# Altium PCB FQDMDPCBv1.1.PcbDoc (part 1 of 2)
Units mil, origin at the board's own origin, x right, y up, seen from the top; angles counter-clockwise.
Board outline 4880 x 5300 mil, 2 copper layers (Top Layer, Bottom Layer); 36 components, 29 nets, 122 pads, 0 vias.
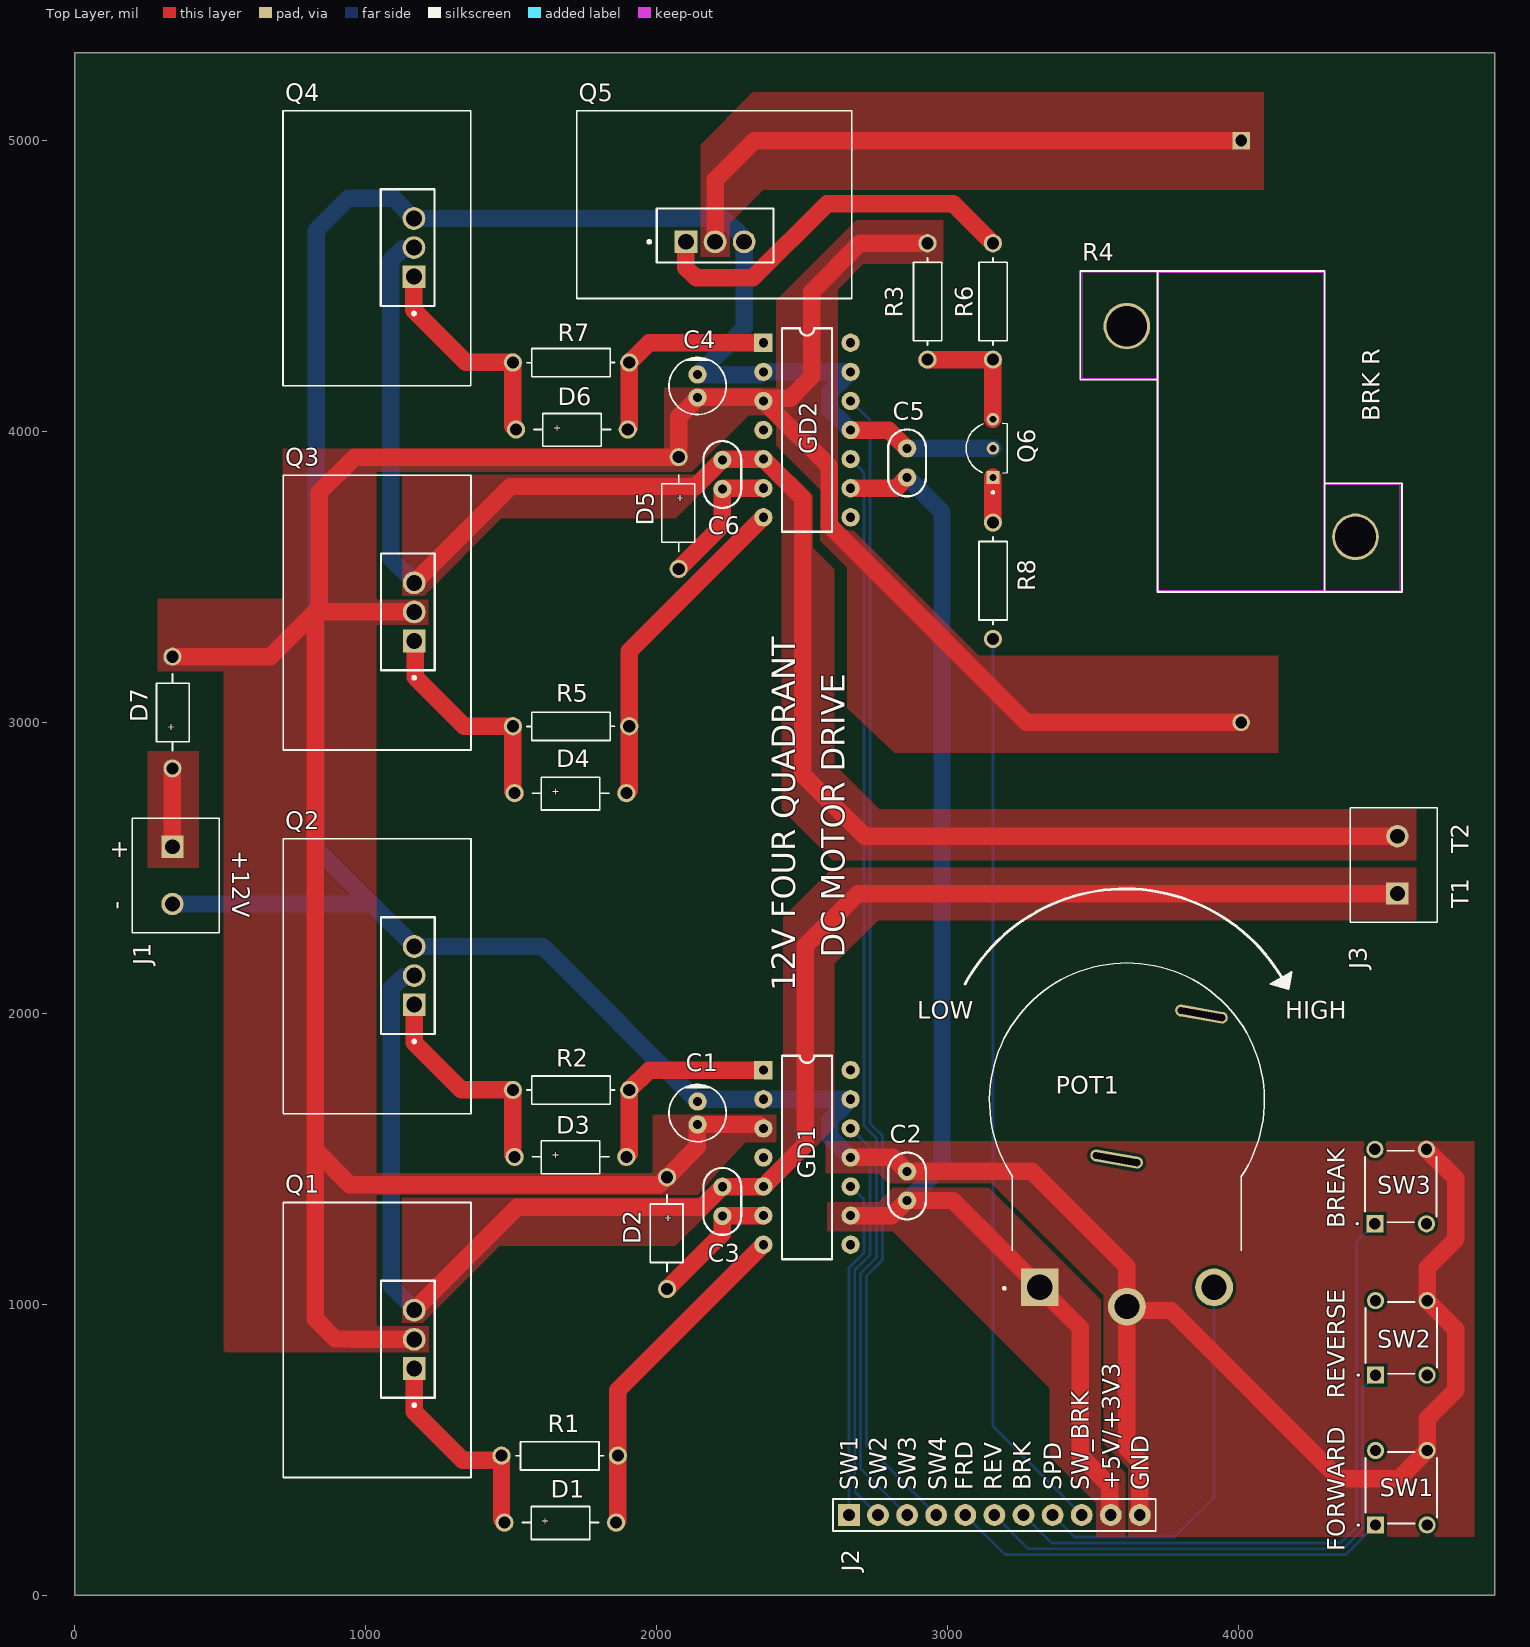
[diagram p0: Top Layer view]
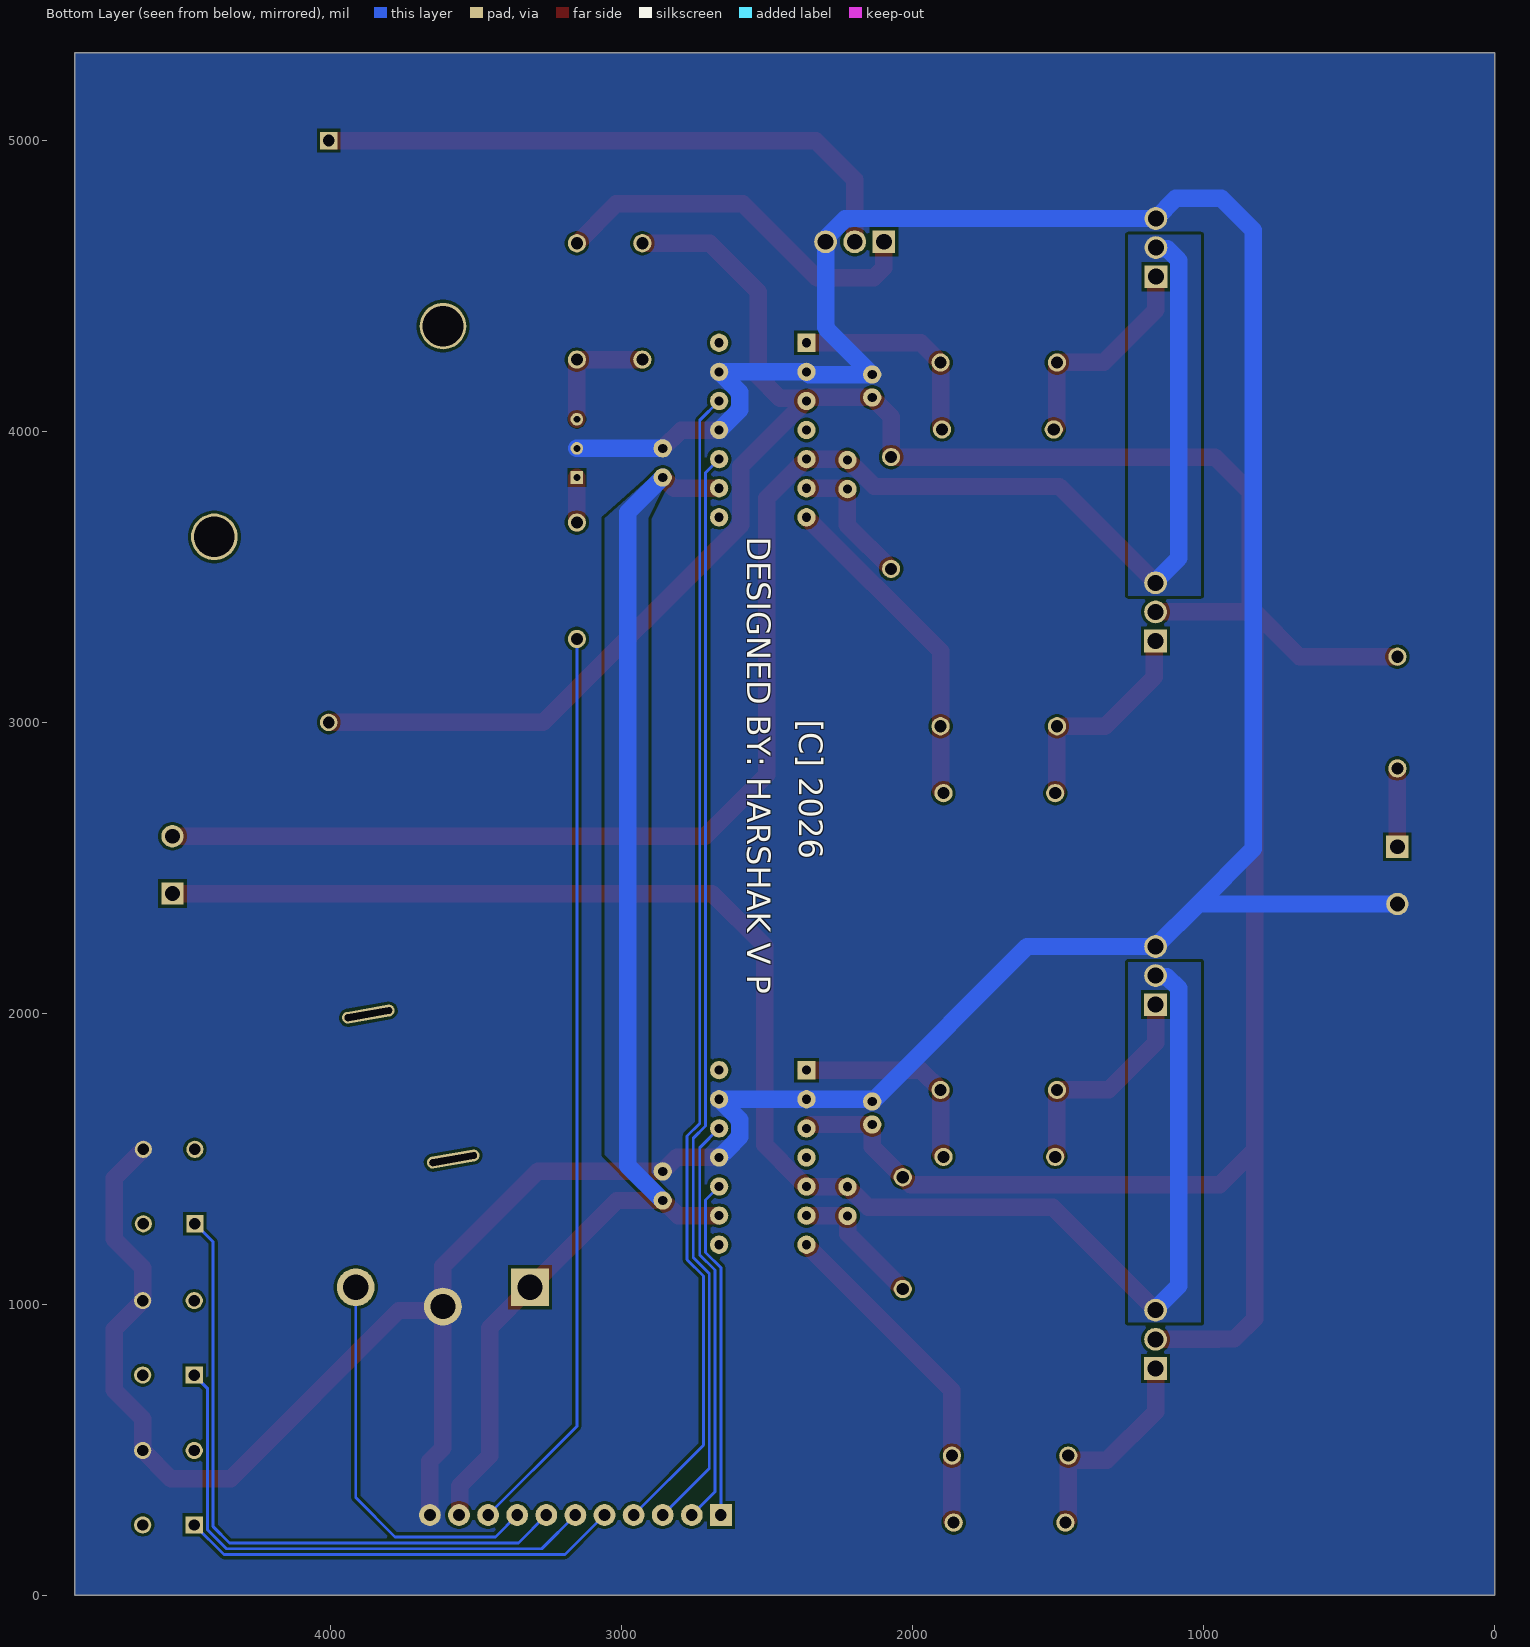
[diagram p1: Bottom Layer view, seen from below]
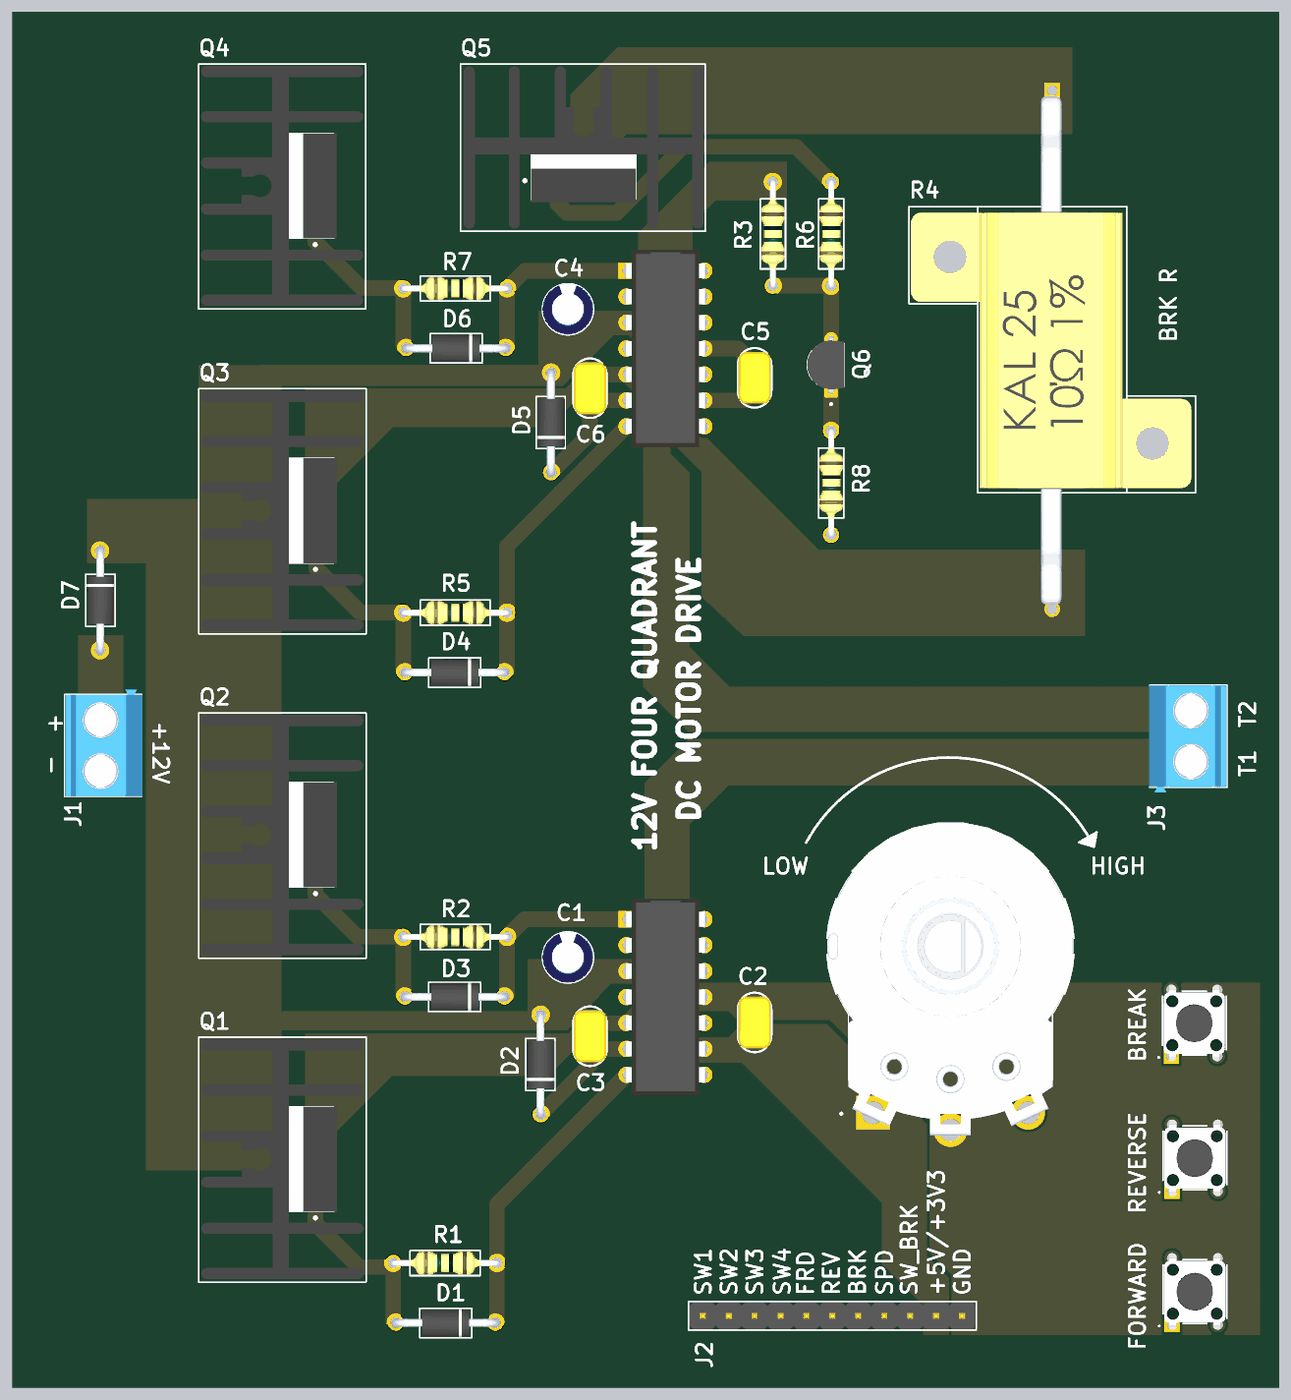
[diagram p2: 3D render of the assembled board from above, using the file's embedded part models]

## Layer stack, top to bottom
Top Solder: solder mask 0.4, Solder Resist, Dk 3.5
Top Layer: signal copper 1.4
Dielectric 1: dielectric 12.6, FR-4, Dk 4.8
Bottom Layer: signal copper 1.4
Bottom Solder: solder mask 0.4, Solder Resist, Dk 3.5

## Board outline
0,0 0,5300 4880,5300 4880,0

## Design rules (kind name [scope] priority, off if disabled: settings)
Clearance [All] p1: gap=10 ignorepadtopadclearanceinfootprint=FALSE
Height [All] p1: minheight=0 maxheight=1500 prefheight=500
HoleSize HoleSizeException [WithinRoom('DR_Room') or WithinRoom('POT_Room')] p1: absolutevalues=TRUE maxlimit=200 minlimit=1 maxpercent=80.000 minpercent=20.000
HoleSize [All] p2: absolutevalues=TRUE maxlimit=100 minlimit=1 maxpercent=80.000 minpercent=20.000
PolygonConnect [All] p1: connectstyle=Direct reliefconductorwidth=10 reliefentries=4 polygonreliefangle="90 Angle" airgapwidth=10
RoomDefinition POT_Room [False vs False] p1: confinementstyle=ConfineIn formatcopy=TRUE lockcomponents=FALSE outline 3325,2165 4125,2165 4125,1365 3325,1365
RoomDefinition DR_Room [False vs False] p2: confinementstyle=ConfineIn formatcopy=TRUE lockcomponents=FALSE outline 3410,4600 4610,4600 4610,3400 3410,3400
RoutingVias [All] p1: holewidth=28 width=50 viastyle="Through Hole" minholewidth=28 minwidth=50 maxholewidth=28 maxwidth=50
SolderMaskExpansion [All] p1: expansion=0 istentingtop=FALSE
SupplyNets "Schematic Supply Nets_2" [InNet('GND')] p1: voltage=0.000
SupplyNets "Schematic Supply Nets_1" [InNet('+12V')] p2: voltage=0.000
SupplyNets "Schematic Supply Nets" [InNet('CON_LOG')] p3: voltage=0.000
Width [All] p1: maxlimit=100 minlimit=10 preferedwidth=10
28 further rules are at their usual default settings.

## Components (designator, comment, footprint, x,y, rotation, side; value= is the part's Value field where it differs from the comment)
C1 "22uF, 50V" Capacitor_Polarized_TH 2140,1617.26 r90 top
C2 "0.1uF, 50V" Capacitor_Ceramic_TH 2860,1456 r270 top value=100nF
C3 "0.22uF, 50W" Capacitor_Ceramic_TH 2225,1403 r270 top value=220nF
C4 "22uF, 50V" Capacitor_Polarized_TH 2140,4116 r90 top
C5 "0.1uF, 50V" Capacitor_Ceramic_TH 2860,3941 r270 top value=100nF
C6 "0.22uF, 50W" Capacitor_Ceramic_TH 2225,3901 r270 top value=220nF
D1 "UF4007" DIODE_TH 1476,249 r0 top
D2 "UF4007" DIODE_TH 2035,1436 r270 top
D3 "UF4007" DIODE_TH 1511,1506 r0 top
D4 "UF4007" DIODE_TH 1511,2756 r0 top
D5 "UF4007" DIODE_TH 2075,3911 r270 top
D6 "UF4007" DIODE_TH 1516,4006 r0 top
D7 "UF4007" DIODE_TH 335,2841 r90 top
GD1 "IR2110PBF" IR2110PBF_DIP14 2366,1804 r0 top
GD2 "IR2110PBF" IR2110PBF_DIP14 2366,4304 r0 top
J1 "TB002-500-02BE" Terminal_Block 335,2571.85 r270 top
J2 "0022284245" Conneting_Jumpers 2660,275 r90 top
J3 "TB002-500-02BE" Terminal_Block 4545,2411 r90 top
POT1 "10k" Potentiometer 3615.55,1700 r0 top value=10kΩ
Q1 "IRFZ44NPBF" IRFZ44NPBF 1166,879 r90 top value=17.5MΩ
Q2 "IRFZ44NPBF" IRFZ44NPBF 1166,2129 r90 top value=17.5MΩ
Q3 "IRFZ44NPBF" IRFZ44NPBF 1166,3379 r90 top value=17.5MΩ
Q4 "IRFZ44NPBF" IRFZ44NPBF 1165,4631 r90 top value=17.5MΩ
Q5 "IRFZ44NPBF" IRFZ44NPBF 2200,4651 r0 top value=17.5MΩ
Q6 "BC547A" TRANS_BC547A 3155,3941 r90 top
R1 "10R, 1/2W" RESISTOR_TH 1466,479 r0 top value=10Ω
R2 "10R, 1/2W" RESISTOR_TH 1505,1736 r0 top value=10Ω
R3 "1K, 1/2W" RESISTOR_TH 2930,4246 r90 top value=1kΩ
R4 "10R, 25W" Braking_Resistor 4008,4999 r270 top value=10Ω
R5 "10R, 1/2W" RESISTOR_TH 1505,2986 r0 top value=10Ω
R6 "10R, 1/2W" RESISTOR_TH 3155,4246 r90 top value=10Ω
R7 "10R, 1/2W" RESISTOR_TH 1505,4236 r0 top value=10Ω
R8 "4.7K, 1/2W" RESISTOR_TH 3155,3286 r90 top value=4.7kΩ
SW1 "3-1825910-5" Pushbutton 4647.17,496.91 r90 top
SW2 "3-1825910-5" Pushbutton 4647.17,1011.91 r90 top
SW3 "3-1825910-5" Pushbutton 4645,1531.91 r90 top

## Footprints (in the part's own frame and the unit in brackets; to place one, negate y for a bottom-side part, rotate by r counter-clockwise, add the part's x,y. Pads: shape width x height; smd on the part's side, far side on the other; paste and mask are expansions set on the pad)
Braking_Resistor [mil]
  rect 60x60 hole 40 paste-99999 mask+0: 1(0,0)
  round 60 hole 40 paste-99999 mask+0: 2(2000,0)
  round 160 hole 140 unplated: 3(638,-393) 4(1362,393)
  Top Layer keep-out region: 453.5,-282.5 453.5,282.5 1546.5,282.5 1546.5,-282.5
  Top Layer keep-out region: 817.5,-282.5 453.5,-282.5 453.5,-547.5 817.5,-547.5
  Top Layer keep-out region: 1182.5,282.5 1546.5,282.5 1546.5,547.5 1182.5,547.5
  silkscreen extent 448,-552 1552,553, body extent 22,-545 1982,537, height 551
Capacitor_Ceramic_TH [mm]
  round 1.6 hole 0.8: 1(0,0) 2(2.54,0)
  silkscreen extent -1.65,-1.65 4.19,1.65, body extent -1.27,-1.58 3.81,1.6, height 7.37
Capacitor_Polarized_TH [mm]
  round 1.6 hole 0.8: 1(0,0) 2(2,0)
  silkscreen extent -1.5,-2.5 3.5,2.5, body extent -1.48,-2.49 3.52,2.51, height 12.41
Conneting_Jumpers [mm]
  rect 1.9x1.9 hole 1.02: 1(0,0)
  round 1.9 hole 1.02: 2(0,-2.54) 3(0,-5.08) 4(0,-7.62) 5(0,-10.16) 6(0,-12.7) 7(0,-15.24) 8(0,-17.78) 9(0,-20.32) 10(0,-22.86) 11(0,-25.4)
  silkscreen extent -1.4,-26.8 1.4,1.4, body extent -1.27,-26.67 1.27,1.27, height 5.95
DIODE_TH [mm] "DIODE STANDARD 1000V 1A DO204AC"
  round 1.59 hole 1.06 mask+0.102: 1(0,0) 2(9.754,0)
  silkscreen extent 1.55,-1.47 8.24,1.4, body extent -0.41,-1.39 10.17,1.33, height 2.71
IR2110PBF_DIP14 [mm]
  rect 1.6x1.6 hole 0.8: 1(0,0)
  round 1.6 hole 0.8: 2(0,-2.54) 3(0,-5.08) 4(0,-7.62) 5(0,-10.16) 6(0,-12.7) 7(0,-15.24) 8(7.62,-15.24) 9(7.62,-12.7) 10(7.62,-10.16) 11(7.62,-7.62) 12(7.62,-5.08) 13(7.62,-2.54) 14(7.62,0)
  silkscreen extent 1.63,-16.51 5.99,1.27, body extent -0.15,-17.27 7.77,2.03, height 5.33
IRFZ44NPBF [mm]
  rect 1.99x1.99 hole 1.39 paste-2539.97 mask+0: 1(-2.54,0)
  round 1.99 hole 1.39 paste-2539.97 mask+0: 2(0,0) 3(2.54,0)
  silkscreen extent -12.06,-4.95 11.94,11.43, body extent -11.75,-4.7 11.75,11.2, height 25.94
Potentiometer [mm]
  rect 3.3x3.3 / inner round 3.3 / far side rect 3.3x3.3 hole 2.2: 1(-7.607,-16.314)
  round 3.3 hole 2.2: 2(0,-18) 3(7.607,-16.314)
  oval 4.65x1.05 hole 0.6 slot 4.2 at 170 deg rot 170: S1(-0.903,-5.121) S2(6.507,7.535)
  silkscreen extent -12,-16.5 12,12, body extent -12.19,-18.52 12.18,12.17, height 35.21
Pushbutton [mil]
  rect 59x59 / inner round 60 / far side rect 59x59 hole 39 paste-99999 mask+0: 1(-255.91,177.17)
  round 59 / inner round 60 / far side round 59 hole 39 paste-99999 mask-29.5: 2(0,177.17) 3(-255.91,0) 4(0,0)
  silkscreen extent -251,-34 -5,212, body extent -285,-29 27,207, height 276
RESISTOR_TH [mm] "RES 10 OHM 5% 1/2W AXIAL"
  round 1.59 hole 1.06 mask+0.102: 1(0,0) 2(10.16,0)
  silkscreen extent 1.24,-1.24 8.9,1.22, body extent -0.3,-1.17 10.46,1.14, height 2.93
Terminal_Block [mm]
  rect 1.95x1.95 / inner round 1.95 / far side rect 1.95x1.95 hole 1.3: 1(0,0)
  round 1.95 hole 1.3: 2(5,0)
  silkscreen extent -2.5,-3.5 7.5,4.1, body extent -2.99,-3.45 7.51,4.15, height 10.01
TRANS_BC547A [mm]
  rect 1.108x1.108 / inner round 1.108 / far side rect 1.108x1.108 hole 0.6 mask+0.102: 1(-2.54,0)
  round 1.108 hole 0.6 mask+0.102: 2(0,0) 3(2.54,0)
  silkscreen extent -3.94,-1.27 2.2,2.33, body extent -2.83,-1.33 2.83,2.35, height 9.97

## Part data
C1 C4: library part SK226M050AC3AAKPLP, "CAP ALUM 22UF 20% 50V RADIAL TH", Manufacturer="Yageo Group", Supplier Part Number=399-6108-ND, Category=Capacitors, Manufacturer Part Number=SK226M050AC3AAKPLP, Pricing="1=0.17, 10=0.105, 50=0.0756, 100=0.0661, 500=0.04946, 1000=0.04419, 2500=0.03855, 5000=0.03511 (USD)", Stock=13633, Supplier=DigiKey
C2 C5: library part C320C104K5R5TA, "CAP CER 0.1UF 50V X7R RADIAL", Case/Package=SOT-23-5, Dielectric=X7R, Dielectric Material=Ceramic, Dropout Voltage=260mV, Manufacturer="Yageo Group", Max Operating Temperature=125°C, Min Input Voltage=8V, Min Operating Temperature=-55°C, Output Current=150mA, Output Voltage=5V, Supplier Part Number=399-4264-ND, Tolerance=10%, Voltage=50V, Category="Ceramic Capacitors", China RoHS=Compliant, ComponentLink1Description=https://datasheet.octopart.com:443/C320C104K5R5TA-KEMET-datasheet-182049030.pdf?src-supplier=IHS, ComponentLink1URL=https://datasheet.octopart.com:443/C320C104K5R5TA-KEMET-datasheet-182049030.pdf?src-supplier=IHS, ComponentLink2Description=https://datasheet.octopart.com:443/C320C104K5R5TA-KEMET-datasheet-101577198.pdf?src-supplier=Farnell, ComponentLink2URL=https://datasheet.octopart.com:443/C320C104K5R5TA-KEMET-datasheet-101577198.pdf?src-supplier=Farnell, ComponentLink3Description=https://datasheet.octopart.com:443/C320C104K5R5TA-KEMET-datasheet-82557385.pdf?src-supplier=Farnell, ComponentLink3URL=https://datasheet.octopart.com:443/C320C104K5R5TA-KEMET-datasheet-82557385.pdf?src-supplier=Farnell, ComponentLink4Description=https://datasheet.octopart.com:443/C320C104K5R5TA-Kemet-datasheet-120818.pdf?src-supplier=Farnell, ComponentLink4URL=https://datasheet.octopart.com:443/C320C104K5R5TA-Kemet-datasheet-120818.pdf?src-supplier=Farnell, ComponentLink5Description=https://datasheet.octopart.com:443/C320C104K5R5TA-KEMET-datasheet-181962010.pdf?src-supplier=Farnell, ComponentLink5URL=https://datasheet.octopart.com:443/C320C104K5R5TA-KEMET-datasheet-181962010.pdf?src-supplier=Farnell, ComponentLink6Description=https://datasheet.octopart.com:443/C320C104K5R5TA-KEMET-datasheet-74832429.pdf?src-supplier=Farnell, ComponentLink6URL=https://datasheet.octopart.com:443/C320C104K5R5TA-KEMET-datasheet-74832429.pdf?src-supplier=Farnell, ComponentLink7Description=https://datasheet.octopart.com:443/C320C104K5R5TA-Kemet-datasheet-66414062.pdf?src-supplier=element14+APAC, ComponentLink7URL=https://datasheet.octopart.com:443/C320C104K5R5TA-Kemet-datasheet-66414062.pdf?src-supplier=element14+APAC, ComponentLink8Description=https://datasheet.octopart.com:443/C320C104K5R5TA-Kemet-datasheet-17277851.pdf?src-supplier=Newark, ComponentLink8URL=https://datasheet.octopart.com:443/C320C104K5R5TA-Kemet-datasheet-17277851.pdf?src-supplier=Newark, ComponentLink9Description=https://datasheet.octopart.com:443/C320C104K5R5TA-KEMET-datasheet-176142619.pdf?src-supplier=Newark, ComponentLink9URL=https://datasheet.octopart.com:443/C320C104K5R5TA-KEMET-datasheet-176142619.pdf?src-supplier=Newark, ComponentLink10Description=https://datasheet.octopart.com:443/C320C104K5R5TA-Kemet-datasheet-7601896.pdf?src-supplier=Newark, ComponentLink10URL=https://datasheet.octopart.com:443/C320C104K5R5TA-Kemet-datasheet-7601896.pdf?src-supplier=Newark, ComponentLink11Description=https://datasheet.octopart.com:443/C320C104K5R5TA-KEMET-datasheet-134136068.pdf?src-supplier=Electro+Sonic, ComponentLink11URL=https://datasheet.octopart.com:443/C320C104K5R5TA-KEMET-datasheet-134136068.pdf?src-supplier=Electro+Sonic, ComponentLink12Description=https://datasheet.octopart.com:443/C320C104K5R5TA-KEMET-datasheet-140078780.pdf?src-supplier=TME, ComponentLink12URL=https://datasheet.octopart.com:443/C320C104K5R5TA-KEMET-datasheet-140078780.pdf?src-supplier=TME, ComponentLink13Description=https://datasheet.octopart.com:443/C320C104K5R5TA-KEMET-datasheet-68332006.pdf?src-supplier=TME, ComponentLink13URL=https://datasheet.octopart.com:443/C320C104K5R5TA-KEMET-datasheet-68332006.pdf?src-supplier=TME, ComponentLink14Description=https://datasheet.octopart.com:443/C320C104K5R5TA-Kemet-datasheet-62346230.pdf?src-supplier=TME, ComponentLink14URL=https://datasheet.octopart.com:443/C320C104K5R5TA-Kemet-datasheet-62346230.pdf?src-supplier=TME, ComponentLink15Description=https://datasheet.octopart.com:443/C320C104K5R5TA-Kemet-datasheet-17577310.pdf?src-supplier=TME, ComponentLink15URL=https://datasheet.octopart.com:443/C320C104K5R5TA-Kemet-datasheet-17577310.pdf?src-supplier=TME, ComponentLink16Description=https://datasheet.octopart.com:443/C320C104K5R5TA-KEMET-datasheet-151955016.pdf?src-supplier=SOS+electronic, ComponentLink16URL=https://datasheet.octopart.com:443/C320C104K5R5TA-KEMET-datasheet-151955016.pdf?src-supplier=SOS+electronic, ComponentLink17Description=https://datasheet.octopart.com:443/C320C104K5R5TA-Kemet-datasheet-48843691.pdf?src-supplier=RS+(Formerly+Allied+Electronics), ComponentLink17URL=https://datasheet.octopart.com:443/C320C104K5R5TA-Kemet-datasheet-48843691.pdf?src-supplier=RS+(Formerly+Allied+Electronics), ComponentLink18Description=https://datasheet.octopart.com:443/C320C104K5R5TA-Kemet-datasheet-10533010.pdf?src-supplier=Jameco, ComponentLink18URL=https://datasheet.octopart.com:443/C320C104K5R5TA-Kemet-datasheet-10533010.pdf?src-supplier=Jameco, Composition=Ceramic, Depth=3.18mm, Dissipation Factor=2.5%, Export Control Classification Number (ECCN) Code=EAR99, Harmonized Tariff Schedule (HTS) Code=8532.24.00.60, Height=5.84mm, Height - Seated (Max)=6.604mm, Introduction Date=2006-07-12, Lead Diameter=510µm, Lead Free="Lead Free", Lead Length=7mm, Lead Pitch=2.54mm, Lead/Base Style=Straight, Length=5.08mm, Lifecycle Status=Production, Manufacturer Part Number=C320C104K5R5TA, Mounting Technology="Surface Mount", Number of Terminals=2, Packaging=Bulk, Pins=2, Pricing="1=0.32, 10=0.186, 50=0.1356, 100=0.1202, 500=0.09408, 1000=0.08603, 2500=0.07755, 5000=0.07244 (USD)", Radiation Hardening=No, REACH SVHC=Yes, RoHS=Compliant, Schedule B="8532240060, 8532240060|8532240060, 8532240060|8532240060|8532240060, 8532240060|8532240060|8532240060|8532240060", Stock=174098, Supplier=DigiKey, Terminal Pitch=2.54mm, Termination=Radial, Voltage Rating=50V, Voltage Rating (DC)=50V, Width=3.18mm
C3 C6: library part C322C224M5U5TA, "CAP CER 0.22UF 50V Z5U RADIAL", Case/Package=Radial, Dielectric=Z5U, Dielectric Material=Ceramic, Manufacturer="Yageo Group", Max Operating Temperature=85°C, Min Operating Temperature=10°C, Supplier Part Number=399-4354-ND, Tolerance=20%, Voltage=50V, Category="Ceramic Capacitors", China RoHS=Compliant, ComponentLink1Description=https://datasheet.octopart.com:443/C322C224M5U5TA-KEMET-datasheet-182049035.pdf?src-supplier=IHS, ComponentLink1URL=https://datasheet.octopart.com:443/C322C224M5U5TA-KEMET-datasheet-182049035.pdf?src-supplier=IHS, ComponentLink2Description=https://datasheet.octopart.com:443/C322C224M5U5TA-KEMET-datasheet-68331992.pdf?src-supplier=Farnell, ComponentLink2URL=https://datasheet.octopart.com:443/C322C224M5U5TA-KEMET-datasheet-68331992.pdf?src-supplier=Farnell, ComponentLink3Description=https://datasheet.octopart.com:443/C322C224M5U5TA-KEMET-datasheet-101577214.pdf?src-supplier=Farnell, ComponentLink3URL=https://datasheet.octopart.com:443/C322C224M5U5TA-KEMET-datasheet-101577214.pdf?src-supplier=Farnell, ComponentLink4Description=https://datasheet.octopart.com:443/C322C224M5U5TA-KEMET-datasheet-181962113.pdf?src-supplier=Farnell, ComponentLink4URL=https://datasheet.octopart.com:443/C322C224M5U5TA-KEMET-datasheet-181962113.pdf?src-supplier=Farnell, ComponentLink5Description=https://datasheet.octopart.com:443/C322C224M5U5TA-KEMET-datasheet-74832493.pdf?src-supplier=Farnell, ComponentLink5URL=https://datasheet.octopart.com:443/C322C224M5U5TA-KEMET-datasheet-74832493.pdf?src-supplier=Farnell, ComponentLink6Description=https://datasheet.octopart.com:443/C322C224M5U5TA-KEMET-datasheet-166950196.pdf?src-supplier=Newark, ComponentLink6URL=https://datasheet.octopart.com:443/C322C224M5U5TA-KEMET-datasheet-166950196.pdf?src-supplier=Newark, ComponentLink7Description=https://datasheet.octopart.com:443/C322C224M5U5TA-Kemet-datasheet-7601896.pdf?src-supplier=Newark, ComponentLink7URL=https://datasheet.octopart.com:443/C322C224M5U5TA-Kemet-datasheet-7601896.pdf?src-supplier=Newark, ComponentLink8Description=https://datasheet.octopart.com:443/C322C224M5U5TA-Kemet-datasheet-66414231.pdf?src-supplier=element14+APAC, ComponentLink8URL=https://datasheet.octopart.com:443/C322C224M5U5TA-Kemet-datasheet-66414231.pdf?src-supplier=element14+APAC, ComponentLink9Description=https://datasheet.octopart.com:443/C322C224M5U5TA-KEMET-datasheet-83995801.pdf?src-supplier=element14+APAC, ComponentLink9URL=https://datasheet.octopart.com:443/C322C224M5U5TA-KEMET-datasheet-83995801.pdf?src-supplier=element14+APAC, ComponentLink10Description=https://datasheet.octopart.com:443/C322C224M5U5TA-KEMET-datasheet-134136068.pdf?src-supplier=Electro+Sonic, ComponentLink10URL=https://datasheet.octopart.com:443/C322C224M5U5TA-KEMET-datasheet-134136068.pdf?src-supplier=Electro+Sonic, ComponentLink11Description=https://datasheet.octopart.com:443/C322C224M5U5TA-Kemet-datasheet-120818.pdf?src-supplier=RS+(Formerly+Allied+Electronics), ComponentLink11URL=https://datasheet.octopart.com:443/C322C224M5U5TA-Kemet-datasheet-120818.pdf?src-supplier=RS+(Formerly+Allied+Electronics), ComponentLink12Description=https://datasheet.octopart.com:443/C322C224M5U5TA-Kemet-datasheet-48843691.pdf?src-supplier=RS+(Formerly+Allied+Electronics), ComponentLink12URL=https://datasheet.octopart.com:443/C322C224M5U5TA-Kemet-datasheet-48843691.pdf?src-supplier=RS+(Formerly+Allied+Electronics), ComponentLink13Description=https://datasheet.octopart.com:443/C322C224M5U5TA-Kemet-datasheet-62346230.pdf?src-supplier=TME, ComponentLink13URL=https://datasheet.octopart.com:443/C322C224M5U5TA-Kemet-datasheet-62346230.pdf?src-supplier=TME, ComponentLink14Description=https://datasheet.octopart.com:443/C322C224M5U5TA-Kemet-datasheet-17577310.pdf?src-supplier=TME, ComponentLink14URL=https://datasheet.octopart.com:443/C322C224M5U5TA-Kemet-datasheet-17577310.pdf?src-supplier=TME, Depth=3.18mm, Dissipation Factor=4%, Export Control Classification Number (ECCN) Code=EAR99, Harmonized Tariff Schedule (HTS) Code=8532.24.00.60, Height=6.6mm, Height - Seated (Max)=6.604mm, Introduction Date=2006-07-12, Lead Diameter=510µm, Lead Free="Lead Free", Lead Length=7mm, Lead Pitch=5.08mm, Lead/Base Style="Formed Leads", Length=5.08mm, Lifecycle Status=Production, Manufacturer Part Number=C322C224M5U5TA, Mounting Technology="PCB, Through Hole", Number of Terminals=2, Packaging=Bulk, Pricing="1=0.46, 10=0.278, 50=0.2064, 100=0.1846, 500=0.14772, 1000=0.13634, 2500=0.12433, 5000=0.1171 (USD)", Radiation Hardening=No, REACH SVHC=Yes, RoHS=Compliant, Schedule B="8532240060, 8532240060|8532240060|8532240060|8532240060|8532240060", Stock=6246, Supplier=DigiKey, Terminal Pitch=5.08mm, Termination=Radial, Voltage Rating=50V, Voltage Rating (DC)=50V, Weight=45.359237g, Width=3.18mm
D1 D2 D3 D4 D5 D6 D7: "DIODE STANDARD 1000V 1A DO204AC", Forward Voltage=1.7V, Manufacturer=Diotec, Manufacturer Lifecycle Status=ACTIVE, Max Forward Surge Current (Ifsm)=30A, Max Operating Temperature=150°C, Max Output current=1A, Min Operating Temperature=-50°C, Peak Non-Repetitive Surge Current=33A, Peak Reverse Current=5µA, Reverse Standoff Voltage=1kV, Supplier Part Number=4878-UF4007TB-ND, Category="Rectifier Diodes", ComponentLink1Description=https://datasheet.octopart.com:443/UF4007-Diotec-datasheet-180727602.pdf?src-supplier=IHS, ComponentLink1URL=https://datasheet.octopart.com:443/UF4007-Diotec-datasheet-180727602.pdf?src-supplier=IHS, ComponentLink2Description=https://datasheet.octopart.com:443/UF4007-Diotec-datasheet-180579404.pdf?src-supplier=IHS, ComponentLink2URL=https://datasheet.octopart.com:443/UF4007-Diotec-datasheet-180579404.pdf?src-supplier=IHS, ComponentLink3Description=https://datasheet.octopart.com:443/UF4007-Diotec-datasheet-168810295.pdf?src-supplier=Diotec, ComponentLink3URL=https://datasheet.octopart.com:443/UF4007-Diotec-datasheet-168810295.pdf?src-supplier=Diotec, ComponentLink4Description=https://datasheet.octopart.com:443/UF4007-Diotec-datasheet-20772177.pdf?src-supplier=Component+Distributors+Inc., ComponentLink4URL=https://datasheet.octopart.com:443/UF4007-Diotec-datasheet-20772177.pdf?src-supplier=Component+Distributors+Inc., ComponentLink5Description=https://datasheet.octopart.com:443/UF4007-Diotec-datasheet-113245491.pdf?src-supplier=TME, ComponentLink5URL=https://datasheet.octopart.com:443/UF4007-Diotec-datasheet-113245491.pdf?src-supplier=TME, ComponentLink6Description=https://datasheet.octopart.com:443/UF4007-Diotec-datasheet-151952907.pdf?src-supplier=SOS+electronic, ComponentLink6URL=https://datasheet.octopart.com:443/UF4007-Diotec-datasheet-151952907.pdf?src-supplier=SOS+electronic, ComponentLink7Description=https://datasheet.octopart.com:443/UF4007-Diotec-datasheet-189099727.pdf?src-supplier=Master+Electronics, ComponentLink7URL=https://datasheet.octopart.com:443/UF4007-Diotec-datasheet-189099727.pdf?src-supplier=Master+Electronics, Country of Origin="Mainland China", Element Configuration=Single, Export Control Classification Number (ECCN) Code=EAR99, Harmonized Tariff Schedule (HTS) Code=85411000, Introduction Date=2000-05-29, Lifecycle Status=Production, Manufacturer Part Number=UF4007, Mounting Technology=Axial, Number of Elements=1, Number of Terminals=2, Pins=2, Pricing="5000=0.05922, 10000=0.05352, 15000=0.0506, 25000=0.04733, 35000=0.04539, 50000=0.04351 (USD)", REACH SVHC=Unknown, Recovery Time=75ns, Reverse Recovery Time=75ns, RoHS=Compliant, Schedule B="8541100080, 8541100080|8541100080, 8541100080|8541100080|8541100080, 8541100080|8541100080|8541100080|8541100080", Stock=19057, Supplier=DigiKey, Weight=300mg
GD1 GD2: "IC GATE DRVR HALF-BRIDGE 14DIP", Case/Package=DIP, Manufacturer=Infineon, Max Operating Temperature=125°C, Max Output current=2.5A, Max Output Voltage=20V, Max Power Dissipation=1.6W, Max Supply Current=340µA, Min Operating Temperature=-40°C, Min Output Voltage=10V, Min Supply Voltage=3V, Nominal Supply Voltage (DC)=15V, Package Quantity=1500, Supplier Part Number=IR2110PBF-ND, Temperature Grade=Automotive, Category="Gate Drivers", Channel Type=Independent, ComponentLink1Description=https://datasheet.octopart.com:443/IR2110PBF-Infineon-datasheet-141402711.pdf?src-supplier=IHS, ComponentLink1URL=https://datasheet.octopart.com:443/IR2110PBF-Infineon-datasheet-141402711.pdf?src-supplier=IHS, ComponentLink2Description=https://datasheet.octopart.com:443/IR2110PBF-International-Rectifier-datasheet-180119011.pdf?src-supplier=IHS, ComponentLink2URL=https://datasheet.octopart.com:443/IR2110PBF-International-Rectifier-datasheet-180119011.pdf?src-supplier=IHS, ComponentLink3Description=https://datasheet.octopart.com:443/IR2110PBF-Infineon-datasheet-3193.pdf?src-supplier=SHENGYU+ELECTRONICS, ComponentLink3URL=https://datasheet.octopart.com:443/IR2110PBF-Infineon-datasheet-3193.pdf?src-supplier=SHENGYU+ELECTRONICS, ComponentLink4Description=https://datasheet.octopart.com:443/IR2110PBF-International-Rectifier-datasheet-8380958.pdf?src-supplier=Jameco, ComponentLink4URL=https://datasheet.octopart.com:443/IR2110PBF-International-Rectifier-datasheet-8380958.pdf?src-supplier=Jameco, ComponentLink5Description=https://datasheet.octopart.com:443/IR2110-International-Rectifier-datasheet-82168.pdf?src-supplier=RS+(Formerly+Allied+Electronics), ComponentLink5URL=https://datasheet.octopart.com:443/IR2110-International-Rectifier-datasheet-82168.pdf?src-supplier=RS+(Formerly+Allied+Electronics), ComponentLink6Description=https://datasheet.octopart.com:443/IR2110PBF-International-Rectifier-datasheet-14156666.pdf?src-supplier=iiiC, ComponentLink6URL=https://datasheet.octopart.com:443/IR2110PBF-International-Rectifier-datasheet-14156666.pdf?src-supplier=iiiC, ComponentLink7Description=https://datasheet.octopart.com:443/IR2110PBF-International-Rectifier-datasheet-521366.pdf?src-supplier=Farnell, ComponentLink7URL=https://datasheet.octopart.com:443/IR2110PBF-International-Rectifier-datasheet-521366.pdf?src-supplier=Farnell, ComponentLink8Description=https://datasheet.octopart.com:443/IR2110-International-Rectifier-datasheet-101786.pdf?src-supplier=B%2bD+Enterprises, ComponentLink8URL=https://datasheet.octopart.com:443/IR2110-International-Rectifier-datasheet-101786.pdf?src-supplier=B%2bD+Enterprises, ComponentLink9Description=http://sigma.octopart.com:80/conflict_mineral_statement/Infineon-company-51.pdf?src-supplier=Compliance+Statements, ComponentLink9URL=http://sigma.octopart.com:80/conflict_mineral_statement/Infineon-company-51.pdf?src-supplier=Compliance+Statements, ComponentLink10Description=http://sigma.octopart.com:80/reach_statement/International-Rectifier-company-55.pdf?src-supplier=Compliance+Statements, ComponentLink10URL=http://sigma.octopart.com:80/reach_statement/International-Rectifier-company-55.pdf?src-supplier=Compliance+Statements, ComponentLink11Description=http://sigma.octopart.com:80/rohs_statement/International-Rectifier-company-54.pdf?src-supplier=Compliance+Statements, ComponentLink11URL=http://sigma.octopart.com:80/rohs_statement/International-Rectifier-company-54.pdf?src-supplier=Compliance+Statements, Country of Origin=USA, Export Control Classification Number (ECCN) Code=EAR99, Fall Time=25ns, Harmonized Tariff Schedule (HTS) Code=8542.39.00.01, Height=4.9276mm, Height - Seated (Max)=5.33mm, Introduction Date=1990-01-01, Lead Free="Contains Lead, Lead Free", Length=19.305mm, Lifecycle Status=NRND, Manufacturer Part Number=IR2110PBF, Max Supply Voltage=20V, Mounting Technology="Through Hole", Number of Channels=2, Number of Circuits=1, Number of Drivers=2, Number of Outputs=2, Number of Terminals=14, Operating Supply Current=340µA, Operating Supply Voltage=15V, Output Current=2.5A, Output Voltage=20V, Pins=14, Power Dissipation=1.6W, Pricing="1=5.22, 10=3.949, 25=3.6308, 100=3.2815, 250=3.11496, 500=3.01456, 1000=2.9319, 2500=2.84466 (USD)", Propagation Delay=150ns, Radiation Hardening=No, REACH SVHC=Yes, Rise Time=35ns, RoHS=Compliant, Schedule B="8542310000, 8542310000|8542310000|8542310000|8542310000|8542310000", Stock=3019, Supplier=DigiKey, Terminal Pitch=2.54mm, Termination="Through Hole", Turn-Off Delay Time=10ns, Turn-On Delay Time=10ns, Type="Integrated Circuit (IC)", Weight=1.620005g, Width=7.62mm
J1 J3: "TERMINAL BLOCK, SCREW TYPE, 5.00", Color=Blue, Current Rating=15A, Manufacturer="Same Sky", Max Operating Temperature=105°C, Min Operating Temperature=-40°C, Supplier Part Number=102-6145-ND, Voltage Rating=300V, Approvals="CE, EN, IEC, UL, cUL", Category="Terminal Blocks", ComponentLink1Description=https://datasheet.octopart.com:443/TB002-500-02BE-Same-Sky-datasheet-181920249.pdf?src-supplier=Same+Sky, ComponentLink1URL=https://datasheet.octopart.com:443/TB002-500-02BE-Same-Sky-datasheet-181920249.pdf?src-supplier=Same+Sky, ComponentLink2Description=https://datasheet.octopart.com:443/TB002-500-02BE-CUI-Devices-datasheet-175928133.pdf?src-supplier=Same+Sky, ComponentLink2URL=https://datasheet.octopart.com:443/TB002-500-02BE-CUI-Devices-datasheet-175928133.pdf?src-supplier=Same+Sky, ComponentLink3Description=https://datasheet.octopart.com:443/TB002-500-02BE-CUI-Devices-datasheet-144794938.pdf?src-supplier=Same+Sky, ComponentLink3URL=https://datasheet.octopart.com:443/TB002-500-02BE-CUI-Devices-datasheet-144794938.pdf?src-supplier=Same+Sky, ComponentLink4Description=https://datasheet.octopart.com:443/TB002-500-02BE-CUI-Devices-datasheet-180438470.pdf?src-supplier=IHS, ComponentLink4URL=https://datasheet.octopart.com:443/TB002-500-02BE-CUI-Devices-datasheet-180438470.pdf?src-supplier=IHS, ComponentLink5Description=https://datasheet.octopart.com:443/TB002-500-02BE-Same-Sky-datasheet-190142077.pdf?src-supplier=element14+APAC, ComponentLink5URL=https://datasheet.octopart.com:443/TB002-500-02BE-Same-Sky-datasheet-190142077.pdf?src-supplier=element14+APAC, ComponentLink6Description=https://datasheet.octopart.com:443/TB002-500-02BE-Same-Sky-datasheet-182881440.pdf?src-supplier=Electro+Sonic, ComponentLink6URL=https://datasheet.octopart.com:443/TB002-500-02BE-Same-Sky-datasheet-182881440.pdf?src-supplier=Electro+Sonic, ComponentLink7Description=https://datasheet.octopart.com:443/TB002-500-02BE-CUI-Devices-datasheet-154730744.pdf?src-supplier=Electro+Sonic, ComponentLink7URL=https://datasheet.octopart.com:443/TB002-500-02BE-CUI-Devices-datasheet-154730744.pdf?src-supplier=Electro+Sonic, ComponentLink8Description=https://datasheet.octopart.com:443/TB002-500-02BE-Same-Sky-datasheet-189105710.pdf?src-supplier=Master+Electronics, ComponentLink8URL=https://datasheet.octopart.com:443/TB002-500-02BE-Same-Sky-datasheet-189105710.pdf?src-supplier=Master+Electronics, ComponentLink9Description=https://datasheet.octopart.com:443/TB002-500-02BE-Same-Sky-datasheet-182050243.pdf?src-supplier=Future+Electronics, ComponentLink9URL=https://datasheet.octopart.com:443/TB002-500-02BE-Same-Sky-datasheet-182050243.pdf?src-supplier=Future+Electronics, ComponentLink10Description=https://datasheet.octopart.com:443/TB002-500-02BE-CUI-Devices-datasheet-175928501.pdf?src-supplier=Future+Electronics, ComponentLink10URL=https://datasheet.octopart.com:443/TB002-500-02BE-CUI-Devices-datasheet-175928501.pdf?src-supplier=Future+Electronics, ComponentLink11Description=https://datasheet.octopart.com:443/TB002-500-02BE-CUI-Devices-datasheet-147843962.pdf?src-supplier=Future+Electronics, ComponentLink11URL=https://datasheet.octopart.com:443/TB002-500-02BE-CUI-Devices-datasheet-147843962.pdf?src-supplier=Future+Electronics, ComponentLink12Description=https://datasheet.octopart.com:443/TB002-500-02BE-CUI-Devices-datasheet-175927966.pdf?src-supplier=CUI+Devices+SCT, ComponentLink12URL=https://datasheet.octopart.com:443/TB002-500-02BE-CUI-Devices-datasheet-175927966.pdf?src-supplier=CUI+Devices+SCT, ComponentLink13Description=https://datasheet.octopart.com:443/TB002-500-02BE-CUI-Devices-datasheet-142371903.pdf?src-supplier=CUI+Devices+SCT, ComponentLink13URL=https://datasheet.octopart.com:443/TB002-500-02BE-CUI-Devices-datasheet-142371903.pdf?src-supplier=CUI+Devices+SCT, ComponentLink14Description=https://octopart.com:443/opatz8j6/c1?t=_d6XHqiISyMdz3GqDMpMVa-p_Jvkhvp5sNnCxcqWn_ULod65gYyeqtAU8mXIOh_Wg3w2RS8HUug8ukSetojDAYe4l9KdGQaHiEH-3uZoBX-ARHQ6m2-ifzFE8jWQyJanpY4-5hgJQ_3uAuJWX4Q_8gyYBLQP3-YByoJQkMZpVu2WGBRUizTI5j8332Nq1mENTS_ZWr51M3q1bd2u_-I4oRWUlnttELbb7Gqti6_mAy0BopwOYrCwQx9N8_qpRDW3jqACwInZ-biH7uwZUrr_ikmLrRkSJJSa1GtQqZAAkN6J57ershcppnqRGbLvO5pqO2zJ1RZ-7UEyE_sttVIoYe03865RlRVm6Ua41WuIkExvrQ&src-supplier=Compliance+Statements, ComponentLink14URL=https://octopart.com:443/opatz8j6/c1?t=_d6XHqiISyMdz3GqDMpMVa-p_Jvkhvp5sNnCxcqWn_ULod65gYyeqtAU8mXIOh_Wg3w2RS8HUug8ukSetojDAYe4l9KdGQaHiEH-3uZoBX-ARHQ6m2-ifzFE8jWQyJanpY4-5hgJQ_3uAuJWX4Q_8gyYBLQP3-YByoJQkMZpVu2WGBRUizTI5j8332Nq1mENTS_ZWr51M3q1bd2u_-I4oRWUlnttELbb7Gqti6_mAy0BopwOYrCwQx9N8_qpRDW3jqACwInZ-biH7uwZUrr_ikmLrRkSJJSa1GtQqZAAkN6J57ershcppnqRGbLvO5pqO2zJ1RZ-7UEyE_sttVIoYe03865RlRVm6Ua41WuIkExvrQ&src-supplier=Compliance+Statements, ComponentLink15Description=https://octopart.com:443/opatz8j6/c1?t=Fh69FySCC_FAAITLVE20KKXwtHtQqkTpoHLNA6Z5YWYFueRwD4q49mEj9O9PRSxBrakavMa31Pa8kd2r3fYUKygL4RoD-kVc1x4qeVz3Yb9Pj4FEkxlHbt_3t9jKY8NB2ui6d_hLRmCwNRAYRZ24_P0tmGdPsByxrvC2nzaecyFyrp6kn2T08PGgBVJgh6FXjbVyu4vRobeiGXpbDCwy7JXDj3RZnbTNNHDLzEi8aUUrQbLL6FvcrfvY9UcC4Z7NM0Mp6QYBnO31ttLBYTUSmmGYQD3BQuI437raKxIIRRpjklxenHLcr9SWZqtlQVlh5tRKpJeLIZOkwryk9ldPQbrjzf6tItEiepShso4m&src-supplier=Compliance+Statements, ComponentLink15URL=https://octopart.com:443/opatz8j6/c1?t=Fh69FySCC_FAAITLVE20KKXwtHtQqkTpoHLNA6Z5YWYFueRwD4q49mEj9O9PRSxBrakavMa31Pa8kd2r3fYUKygL4RoD-kVc1x4qeVz3Yb9Pj4FEkxlHbt_3t9jKY8NB2ui6d_hLRmCwNRAYRZ24_P0tmGdPsByxrvC2nzaecyFyrp6kn2T08PGgBVJgh6FXjbVyu4vRobeiGXpbDCwy7JXDj3RZnbTNNHDLzEi8aUUrQbLL6FvcrfvY9UcC4Z7NM0Mp6QYBnO31ttLBYTUSmmGYQD3BQuI437raKxIIRRpjklxenHLcr9SWZqtlQVlh5tRKpJeLIZOkwryk9ldPQbrjzf6tItEiepShso4m&src-supplier=Compliance+Statements, ComponentLink16Description=https://octopart.com:443/opatz8j6/c1?t=ZFxnMsm8sK3bD_kGUlZ1vBoLjtd3_wnTa5xCvrzWhqbv33Rbc1Vzl0KqEsDBOeYS-6nO5bqMiBMEbYeAxLQwKUbqTTlr9DGpqRpUh6_FciqCjj7lLOifF1By89luP7-VGXvA_aSs-Q8fic8YTZbO-yiWmglfOoz_DpnNKa0PZ7oxIKexP9wQrKgK6QKdf50TpcL_OfMCF0XFrhvmFs4hxPs1bqlQy7ktkiZKWcaQTV0U73jFrPMQ0U6W7adLUaPkfXicQfiwn6Iuk9lym1IjoLcKSr9Ir93zO2AylXmdyJhs9hAIgAOLhZsKLNWxFjSJqn4uB1VXAHsScVhsV3E83a4_oxNw2TrVibyCM28fsLWi4Q&src-supplier=Compliance+Statements, ComponentLink16URL=https://octopart.com:443/opatz8j6/c1?t=ZFxnMsm8sK3bD_kGUlZ1vBoLjtd3_wnTa5xCvrzWhqbv33Rbc1Vzl0KqEsDBOeYS-6nO5bqMiBMEbYeAxLQwKUbqTTlr9DGpqRpUh6_FciqCjj7lLOifF1By89luP7-VGXvA_aSs-Q8fic8YTZbO-yiWmglfOoz_DpnNKa0PZ7oxIKexP9wQrKgK6QKdf50TpcL_OfMCF0XFrhvmFs4hxPs1bqlQy7ktkiZKWcaQTV0U73jFrPMQ0U6W7adLUaPkfXicQfiwn6Iuk9lym1IjoLcKSr9Ir93zO2AylXmdyJhs9hAIgAOLhZsKLNWxFjSJqn4uB1VXAHsScVhsV3E83a4_oxNw2TrVibyCM28fsLWi4Q&src-supplier=Compliance+Statements, ComponentLink17Description=https://octopart.com:443/opatz8j6/c1?t=VHr7NaVe6D59iZsQQE60n8UI8GKnW7XBfT2cpY_5hBpGdOxnwbnsYcObjOlO5SPd7j1Y_eq0KLMA6vVg8wksPOR1baprHzaQWSi5QXTpvLsTIdCeJNcD4FG3FRVGioUqfNbDK_2u_JsLrVICQxHg6QdtXBp0Iznmn0fICWO7GQbQKq7q6HDTYUbFY5k-7KTF5O-lxIzS7RlH-GyKmf-3fgnfrjINXiTF4AUFp5D8bLPGWxHUzku-PH3wrMtUu9p9-7d3ZEfcNtR0jaQ7c11llhmLVTUcdwCd53QoqbVnvWJrfQdScf93rdF94vRPCZLKpB2mzy-IRH-Igm1TSdTqhMa1TrhLqLEnjLxhOp8K&src-supplier=Compliance+Statements, ComponentLink17URL=https://octopart.com:443/opatz8j6/c1?t=VHr7NaVe6D59iZsQQE60n8UI8GKnW7XBfT2cpY_5hBpGdOxnwbnsYcObjOlO5SPd7j1Y_eq0KLMA6vVg8wksPOR1baprHzaQWSi5QXTpvLsTIdCeJNcD4FG3FRVGioUqfNbDK_2u_JsLrVICQxHg6QdtXBp0Iznmn0fICWO7GQbQKq7q6HDTYUbFY5k-7KTF5O-lxIzS7RlH-GyKmf-3fgnfrjINXiTF4AUFp5D8bLPGWxHUzku-PH3wrMtUu9p9-7d3ZEfcNtR0jaQ7c11llhmLVTUcdwCd53QoqbVnvWJrfQdScf93rdF94vRPCZLKpB2mzy-IRH-Igm1TSdTqhMa1TrhLqLEnjLxhOp8K&src-supplier=Compliance+Statements, Export Control Classification Number (ECCN) Code=EAR99, Harmonized Tariff Schedule (HTS) Code=8536.90.40.00, Height=10mm, Introduction Date=2024-10-09, Lifecycle Status=Production, Manufacturer Part Number=TB002-500-02BE, Mounting Technology=Screw, Number of Contacts=2, Number of Levels=1, Number of Rows=1, Orientation=Horizontal, Pins=2, Pitch=5mm, Pricing="1=0.32, 10=0.242, 25=0.212, 50=0.191, 100=0.1721, 250=0.15076, 500=0.13744, 3000=0.11318, 6000=0.10697 (USD)", REACH SVHC=No, RoHS=Compliant, Stock=119506, Supplier=DigiKey, Width=7.6mm, Wire/Cable Gauge=12AWG
J2: "CONN HEADER VERT 24POS 2.54MM", Color=Black, Contact Resistance=20mΩ, Current Rating=4A, Insulation Resistance=50GΩ, Manufacturer=Molex, Manufacturer Lifecycle Status=ACTIVE, Manufacturer Part Number=22-28-4245, Max Operating Temperature=75°C, Min Operating Temperature=-40°C, Ratings=CSA, Supplier Part Number=900-0022284245-ND, Category="Headers and Wire Housings", China RoHS=Compliant, ComponentLink1Description=https://datasheet.octopart.com:443/22-28-4245-Molex-datasheet-166051265.pdf?src-supplier=IHS, ComponentLink1URL=https://datasheet.octopart.com:443/22-28-4245-Molex-datasheet-166051265.pdf?src-supplier=IHS, ComponentLink2Description=https://datasheet.octopart.com:443/022284245-Molex-datasheet-8337137.pdf?src-supplier=Arrow+Electronics, ComponentLink2URL=https://datasheet.octopart.com:443/022284245-Molex-datasheet-8337137.pdf?src-supplier=Arrow+Electronics, ComponentLink3Description=https://datasheet.octopart.com:443/22-28-4245-Molex-datasheet-16300812.pdf?src-supplier=Molex, ComponentLink3URL=https://datasheet.octopart.com:443/22-28-4245-Molex-datasheet-16300812.pdf?src-supplier=Molex, ComponentLink4Description=https://sigma.octopart.com:443/16300370/technical_drawing/Molex-22-28-4245.pdf?src-supplier=Molex, ComponentLink4URL=https://sigma.octopart.com:443/16300370/technical_drawing/Molex-22-28-4245.pdf?src-supplier=Molex, ComponentLink5Description=https://datasheet.octopart.com:443/22-28-4245-Molex-datasheet-4210.pdf?src-supplier=DigiKey, ComponentLink5URL=https://datasheet.octopart.com:443/22-28-4245-Molex-datasheet-4210.pdf?src-supplier=DigiKey, ComponentLink6Description=http://sigma.octopart.com:80/16300813/rohs_statement/Molex-22-28-4245.pdf?src-supplier=Compliance+Statements, ComponentLink6URL=http://sigma.octopart.com:80/16300813/rohs_statement/Molex-22-28-4245.pdf?src-supplier=Compliance+Statements, ComponentLink7Description=http://sigma.octopart.com:80/reach_statement/Molex-company-74.pdf?src-supplier=Compliance+Statements, ComponentLink7URL=http://sigma.octopart.com:80/reach_statement/Molex-company-74.pdf?src-supplier=Compliance+Statements, ComponentLink8Description=http://sigma.octopart.com:80/rohs_statement/Molex-company-73.pdf?src-supplier=Compliance+Statements, ComponentLink8URL=http://sigma.octopart.com:80/rohs_statement/Molex-company-73.pdf?src-supplier=Compliance+Statements, ComponentLink9Description=http://sigma.octopart.com:80/conflict_mineral_statement/Molex-company-72.pdf?src-supplier=Compliance+Statements, ComponentLink9URL=http://sigma.octopart.com:80/conflict_mineral_statement/Molex-company-72.pdf?src-supplier=Compliance+Statements, Contact Material=Brass, Contact Plating=Gold, Country of Origin=US, Export Control Classification Number (ECCN) Code=EAR99, Gender=Male, Harmonized Tariff Schedule (HTS) Code=8536.69.40.40, Housing Color=Black, Introduction Date=1994-12-01, Lead Free="Lead Free", Lifecycle Status=Production, Mounting Technology="Through Hole", Number of Circuits=24, Number of Contacts=24, Number of Positions=24, Number of Rows=1, Orientation=Vertical, Packaging=Bulk, Pins=24, Pitch=2.54mm, Plating=Tin, Plating Thickness=381nm, Pricing="1=3.81, 10=3.237, 100=2.7512, 500=2.45582, 1000=2.33866 (USD)", REACH SVHC=Yes, RoHS=Compliant, Schedule B="8536694040, 8536694040|8536694040|8536694040|8536694040|8536694040", Stock=623, Supplier=DigiKey, Terminal Pitch=2.54mm, Termination=Solder
POT1: library part PTN24B-C1015DPA, "POT 10K OHM 1/2W CARBON LOG", Manufacturer="Same Sky", Max Operating Temperature=75°C, Min Operating Temperature=-10°C, Power Rating=500mW, Supplier Part Number=2223-PTN24B-C1015DPA-ND, Tolerance=20%, Working Voltage=200V, Category="Variable Resistors and Potentiometers", ComponentLink1Description=https://datasheet.octopart.com:443/PTN24B-C1015DPA-Same-Sky-datasheet-188841729.pdf?src-supplier=Same+Sky, ComponentLink1URL=https://datasheet.octopart.com:443/PTN24B-C1015DPA-Same-Sky-datasheet-188841729.pdf?src-supplier=Same+Sky, ComponentLink2Description=https://datasheet.octopart.com:443/PTN24B-C1015DPA-Same-Sky-datasheet-181918476.pdf?src-supplier=Same+Sky, ComponentLink2URL=https://datasheet.octopart.com:443/PTN24B-C1015DPA-Same-Sky-datasheet-181918476.pdf?src-supplier=Same+Sky, ComponentLink3Description=https://datasheet.octopart.com:443/PTN24B-C1015DPA-Same-Sky-datasheet-181918471.pdf?src-supplier=Same+Sky, ComponentLink3URL=https://datasheet.octopart.com:443/PTN24B-C1015DPA-Same-Sky-datasheet-181918471.pdf?src-supplier=Same+Sky, ComponentLink4Description=https://datasheet.octopart.com:443/PTN24B-C1015DPA-Same-Sky-datasheet-187906917.pdf?src-supplier=Master+Electronics, ComponentLink4URL=https://datasheet.octopart.com:443/PTN24B-C1015DPA-Same-Sky-datasheet-187906917.pdf?src-supplier=Master+Electronics, ComponentLink5Description=https://datasheet.octopart.com:443/PTN24B-C1015DPA-Same-Sky-datasheet-189105520.pdf?src-supplier=Master+Electronics, ComponentLink5URL=https://datasheet.octopart.com:443/PTN24B-C1015DPA-Same-Sky-datasheet-189105520.pdf?src-supplier=Master+Electronics, ComponentLink6Description=https://datasheet.octopart.com:443/PTN24B-C1015DPA-Same-Sky-datasheet-192883988.pdf?src-supplier=Farnell, ComponentLink6URL=https://datasheet.octopart.com:443/PTN24B-C1015DPA-Same-Sky-datasheet-192883988.pdf?src-supplier=Farnell, ComponentLink7Description=https://octopart.com:443/opatz8j6/c1?t=YQRvJ7gDvh_EQ6R75LgrlhbzJglIWd-Zs-_TbWp9zzyS7xMEun0TqdaotDUHxDpGHEwURK-qfBlwVEWsgmJ0dE_NkcOaHL_GalHLrllO6E0Q7Xd0_452wpsmYPPehPzYW7FYgN5IpniQC1llIPTmjl1R-X3y0ZwnLQdchG7SU2B74IZYJi5oMmDHXItJ8HB_66yRldMRj6y66xrmhr26xQMskvOoLNNikJogOuzL1tJULQfIXBCT1DzwDpjG562-6ncgU8LRDtMIOWUOES9GsFYQpzR-evdIEES4ZdYPzshuVnkkwEBwSdYe6QtQwjP6VBrh2au9hzVLXuEBhQ5corUWXPIk73f3o_0ns4L5rEXh&src-supplier=Compliance+Statements, ComponentLink7URL=https://octopart.com:443/opatz8j6/c1?t=YQRvJ7gDvh_EQ6R75LgrlhbzJglIWd-Zs-_TbWp9zzyS7xMEun0TqdaotDUHxDpGHEwURK-qfBlwVEWsgmJ0dE_NkcOaHL_GalHLrllO6E0Q7Xd0_452wpsmYPPehPzYW7FYgN5IpniQC1llIPTmjl1R-X3y0ZwnLQdchG7SU2B74IZYJi5oMmDHXItJ8HB_66yRldMRj6y66xrmhr26xQMskvOoLNNikJogOuzL1tJULQfIXBCT1DzwDpjG562-6ncgU8LRDtMIOWUOES9GsFYQpzR-evdIEES4ZdYPzshuVnkkwEBwSdYe6QtQwjP6VBrh2au9hzVLXuEBhQ5corUWXPIk73f3o_0ns4L5rEXh&src-supplier=Compliance+Statements, ComponentLink8Description=https://octopart.com:443/opatz8j6/c1?t=yd0XYqWMQOmLluRv1C33-lZKEhVePz7XjnhThX6xqc96f4wNtB5e1Jbbv_1ORIn0evzpUUOuwvSmkarLiepKyho86S4EXcajkEE52BANwgWr0sIq6zrlTKh73_f7uOZt13Mb82hWrjD7I3lD3Ftr80wI9hLT-eTEfiya_13K5Qre34dPnBCCDxNYjkzOwn6Kt4c5X8T-cXrdUkH7yrtsugvcjtzYxjkosQOIHkjPgsySin-0QnifZVVz4uC5OD642sJuQRzaDfPkMYIcQJd8or-eqt48xKsuAObUMiEGJVgs09SbKBMJX_o4qesJ3Q8--CuJe_Y8cmF3aL60XXS0fN005lPkr91m1SPBLahdUIDd&src-supplier=Compliance+Statements, ComponentLink8URL=https://octopart.com:443/opatz8j6/c1?t=yd0XYqWMQOmLluRv1C33-lZKEhVePz7XjnhThX6xqc96f4wNtB5e1Jbbv_1ORIn0evzpUUOuwvSmkarLiepKyho86S4EXcajkEE52BANwgWr0sIq6zrlTKh73_f7uOZt13Mb82hWrjD7I3lD3Ftr80wI9hLT-eTEfiya_13K5Qre34dPnBCCDxNYjkzOwn6Kt4c5X8T-cXrdUkH7yrtsugvcjtzYxjkosQOIHkjPgsySin-0QnifZVVz4uC5OD642sJuQRzaDfPkMYIcQJd8or-eqt48xKsuAObUMiEGJVgs09SbKBMJX_o4qesJ3Q8--CuJe_Y8cmF3aL60XXS0fN005lPkr91m1SPBLahdUIDd&src-supplier=Compliance+Statements, Composition=Carbon, Height=30.5mm, Length=24mm, Lifecycle Status=Production, Manufacturer Part Number=PTN24B-C1015DPA, Number of Terminals=3, Number of Turns=1, Pricing="1=1.52, 10=1.27, 40=1.1365, 80=1.07475, 120=1.04, 280=0.97075, 520=0.9229, 1000=0.87477, 5000=0.76632 (USD)", Stock=981, Supplier=DigiKey, Width=20.2mm
Q1 Q2 Q3 Q4 Q5: "MOSFET N-CH 55V 49A TO220AB", Case/Package=TO-220AB, Continuous Drain Current (ID)=49A, Drain to Source Breakdown Voltage=55V, Drain to Source Resistance=17.5mΩ, Gate to Source Voltage (Vgs)=20V, Input Capacitance=1.47nF, Manufacturer=Infineon, Max Junction Temperature (Tj)=175°C, Max Power Dissipation=94W, Min Operating Temperature=-55°C, Package Quantity=1000, Power Dissipation=83W, Supplier Part Number=IRFZ44NPBF-ND, Threshold Voltage=2.1V, Category=MOSFETs, ComponentLink1Description=https://datasheet.octopart.com:443/IRFZ44NPBF-Infineon-datasheet-10898344.pdf?src-supplier=IHS, ComponentLink1URL=https://datasheet.octopart.com:443/IRFZ44NPBF-Infineon-datasheet-10898344.pdf?src-supplier=IHS, ComponentLink2Description=https://datasheet.octopart.com:443/IRFZ44NPBF-Infineon-datasheet-180070255.pdf?src-supplier=IHS, ComponentLink2URL=https://datasheet.octopart.com:443/IRFZ44NPBF-Infineon-datasheet-180070255.pdf?src-supplier=IHS, ComponentLink3Description=https://datasheet.octopart.com:443/IRFZ44NPBF-Infineon-datasheet-163297.pdf?src-supplier=Farnell, ComponentLink3URL=https://datasheet.octopart.com:443/IRFZ44NPBF-Infineon-datasheet-163297.pdf?src-supplier=Farnell, ComponentLink4Description=https://datasheet.octopart.com/IRFZ44NPBF-Infineon-datasheet-7575919.pdf, ComponentLink4URL=https://datasheet.octopart.com/IRFZ44NPBF-Infineon-datasheet-7575919.pdf, ComponentLink5Description=https://datasheet.octopart.com:443/IRFZ44N-International-Rectifier-datasheet-82086.pdf?src-supplier=Newark, ComponentLink5URL=https://datasheet.octopart.com:443/IRFZ44N-International-Rectifier-datasheet-82086.pdf?src-supplier=Newark, ComponentLink6Description=https://datasheet.octopart.com:443/IRFZ44NPBF-International-Rectifier-datasheet-7564879.pdf?src-supplier=_legacy+Avnet, ComponentLink6URL=https://datasheet.octopart.com:443/IRFZ44NPBF-International-Rectifier-datasheet-7564879.pdf?src-supplier=_legacy+Avnet, ComponentLink7Description=https://datasheet.octopart.com:443/IRFZ44NPBF-International-Rectifier-datasheet-14061588.pdf?src-supplier=iiiC, ComponentLink7URL=https://datasheet.octopart.com:443/IRFZ44NPBF-International-Rectifier-datasheet-14061588.pdf?src-supplier=iiiC, ComponentLink8Description=https://datasheet.octopart.com:443/IRFZ44N-International-Rectifier-datasheet-10733621.pdf?src-supplier=iiiC, ComponentLink8URL=https://datasheet.octopart.com:443/IRFZ44N-International-Rectifier-datasheet-10733621.pdf?src-supplier=iiiC, ComponentLink9Description=https://datasheet.octopart.com:443/IRFZ44NPBF-Infineon-datasheet-9874387.pdf?src-supplier=RS+(Formerly+Allied+Electronics), ComponentLink9URL=https://datasheet.octopart.com:443/IRFZ44NPBF-Infineon-datasheet-9874387.pdf?src-supplier=RS+(Formerly+Allied+Electronics), ComponentLink10Description=https://datasheet.octopart.com:443/IRFZ44N-International-Rectifier-datasheet-58767.pdf?src-supplier=RS+(Formerly+Allied+Electronics), ComponentLink10URL=https://datasheet.octopart.com:443/IRFZ44N-International-Rectifier-datasheet-58767.pdf?src-supplier=RS+(Formerly+Allied+Electronics), ComponentLink11Description=https://datasheet.octopart.com:443/IRFZ44NPBF-Infineon-datasheet-7280676.pdf?src-supplier=Jameco, ComponentLink11URL=https://datasheet.octopart.com:443/IRFZ44NPBF-Infineon-datasheet-7280676.pdf?src-supplier=Jameco, ComponentLink12Description=https://datasheet.octopart.com:443/IRFZ44NPBF-International-Rectifier-datasheet-92204.pdf?src-supplier=DigiKey, ComponentLink12URL=https://datasheet.octopart.com:443/IRFZ44NPBF-International-Rectifier-datasheet-92204.pdf?src-supplier=DigiKey, ComponentLink13Description=http://sigma.octopart.com:80/conflict_mineral_statement/Infineon-company-51.pdf?src-supplier=Compliance+Statements, ComponentLink13URL=http://sigma.octopart.com:80/conflict_mineral_statement/Infineon-company-51.pdf?src-supplier=Compliance+Statements, ComponentLink14Description=http://sigma.octopart.com:80/reach_statement/International-Rectifier-company-55.pdf?src-supplier=Compliance+Statements, ComponentLink14URL=http://sigma.octopart.com:80/reach_statement/International-Rectifier-company-55.pdf?src-supplier=Compliance+Statements, ComponentLink15Description=http://sigma.octopart.com:80/rohs_statement/International-Rectifier-company-54.pdf?src-supplier=Compliance+Statements, ComponentLink15URL=http://sigma.octopart.com:80/rohs_statement/International-Rectifier-company-54.pdf?src-supplier=Compliance+Statements, Contact Plating=Tin, Country of Origin="Mainland China, Mexico", Current Rating=49A, Drain to Source Voltage (Vdss)=55V, Dual Supply Voltage=55V, Element Configuration=Single, Export Control Classification Number (ECCN) Code=EAR99, Fall Time=45ns, Harmonized Tariff Schedule (HTS) Code=8541.29.00.95, Height=8.77mm, Introduction Date=2003-10-31, Lead Free="Lead Free", Lead Pitch=2.54mm, Length=10.668mm, Lifecycle Status=Production, Manufacturer Part Number=IRFZ44NPBF, Max Operating Temperature=175°C, Min Breakdown Voltage=55V, Mounting Technology="Through Hole", Nominal Vgs=2.1V, Number of Elements=1, Number of Terminals=3, On-State Resistance=17.5mΩ, Packaging=Bulk, Pins=3, Pricing="1=1.81, 50=0.8528, 100=0.759, 500=0.59426, 1000=0.54123, 2000=0.49662, 5000=0.44834, 10000=0.41852 (USD)", Radiation Hardening=No, Rds On Max=17.5mΩ, REACH SVHC=Yes, Recovery Time=95ns, Rise Time=60ns, RoHS=Compliant, Schedule B="8541290080, 8541290080|8541290080, 8541290080|8541290080|8541290080, 8541290080|8541290080|8541290080|8541290080", Stock=18868, Supplier=DigiKey, Termination="Through Hole", Turn-Off Delay Time=44ns, Turn-On Delay Time=12ns, Voltage Rating (DC)=55V, Width=4.826mm
Q6: "TRANS NPN 45V 0.1A TO-92", Case/Package=TO-92, Collector Emitter Saturation Voltage=600mV, Collector Emitter Voltage (VCEO)=45V, Manufacturer=Diotec, Manufacturer Lifecycle Status=ACTIVE, Max Collector Current=100mA, Max Operating Temperature=150°C, Max Power Dissipation=500mW, Supplier Part Number=4878-BC547ATB-ND, Transition Frequency=300MHz, Category=BJTs, ComponentLink1Description=https://datasheet.octopart.com:443/BC547A-Diotec-datasheet-166821072.pdf?src-supplier=IHS, ComponentLink1URL=https://datasheet.octopart.com:443/BC547A-Diotec-datasheet-166821072.pdf?src-supplier=IHS, ComponentLink2Description=https://datasheet.octopart.com:443/BC547A-Diotec-datasheet-17564947.pdf?src-supplier=Component+Distributors+Inc., ComponentLink2URL=https://datasheet.octopart.com:443/BC547A-Diotec-datasheet-17564947.pdf?src-supplier=Component+Distributors+Inc., ComponentLink3Description=https://datasheet.octopart.com:443/BC547A-Diotec-datasheet-113241320.pdf?src-supplier=TME, ComponentLink3URL=https://datasheet.octopart.com:443/BC547A-Diotec-datasheet-113241320.pdf?src-supplier=TME, ComponentLink4Description=https://datasheet.octopart.com:443/BC547A-Diotec-datasheet-188865637.pdf?src-supplier=TME, ComponentLink4URL=https://datasheet.octopart.com:443/BC547A-Diotec-datasheet-188865637.pdf?src-supplier=TME, Country of Origin="Mainland China", Export Control Classification Number (ECCN) Code=EAR99, Harmonized Tariff Schedule (HTS) Code=85412100, hFE Min=110, Introduction Date=2002-03-22, Lifecycle Status=Production, Manufacturer Part Number=BC547A, Mounting Technology="Through Hole", Number of Channels=1, Number of Elements=1, Number of Terminals=3, Polarity=NPN, Power Dissipation=500mW, Pricing="4000=0.0267, 8000=0.02375, 12000=0.02224, 20000=0.02054, 28000=0.01954, 40000=0.01856 (USD)", REACH SVHC=Unknown, RoHS=Compliant, Stock=3793, Supplier=DigiKey, Weight=336mg